# Altium PCB Driver Morpheu v4.0.PcbDoc
Units mm, origin at the board's own origin, x right, y up, seen from the top; angles counter-clockwise.
Board outline 51.05 x 56.52 mm, 2 copper layers (Top Layer, Bottom Layer); 74 components, 41 nets, 232 pads, 39 vias.
Unrouted connection lines stored in the file: 14.
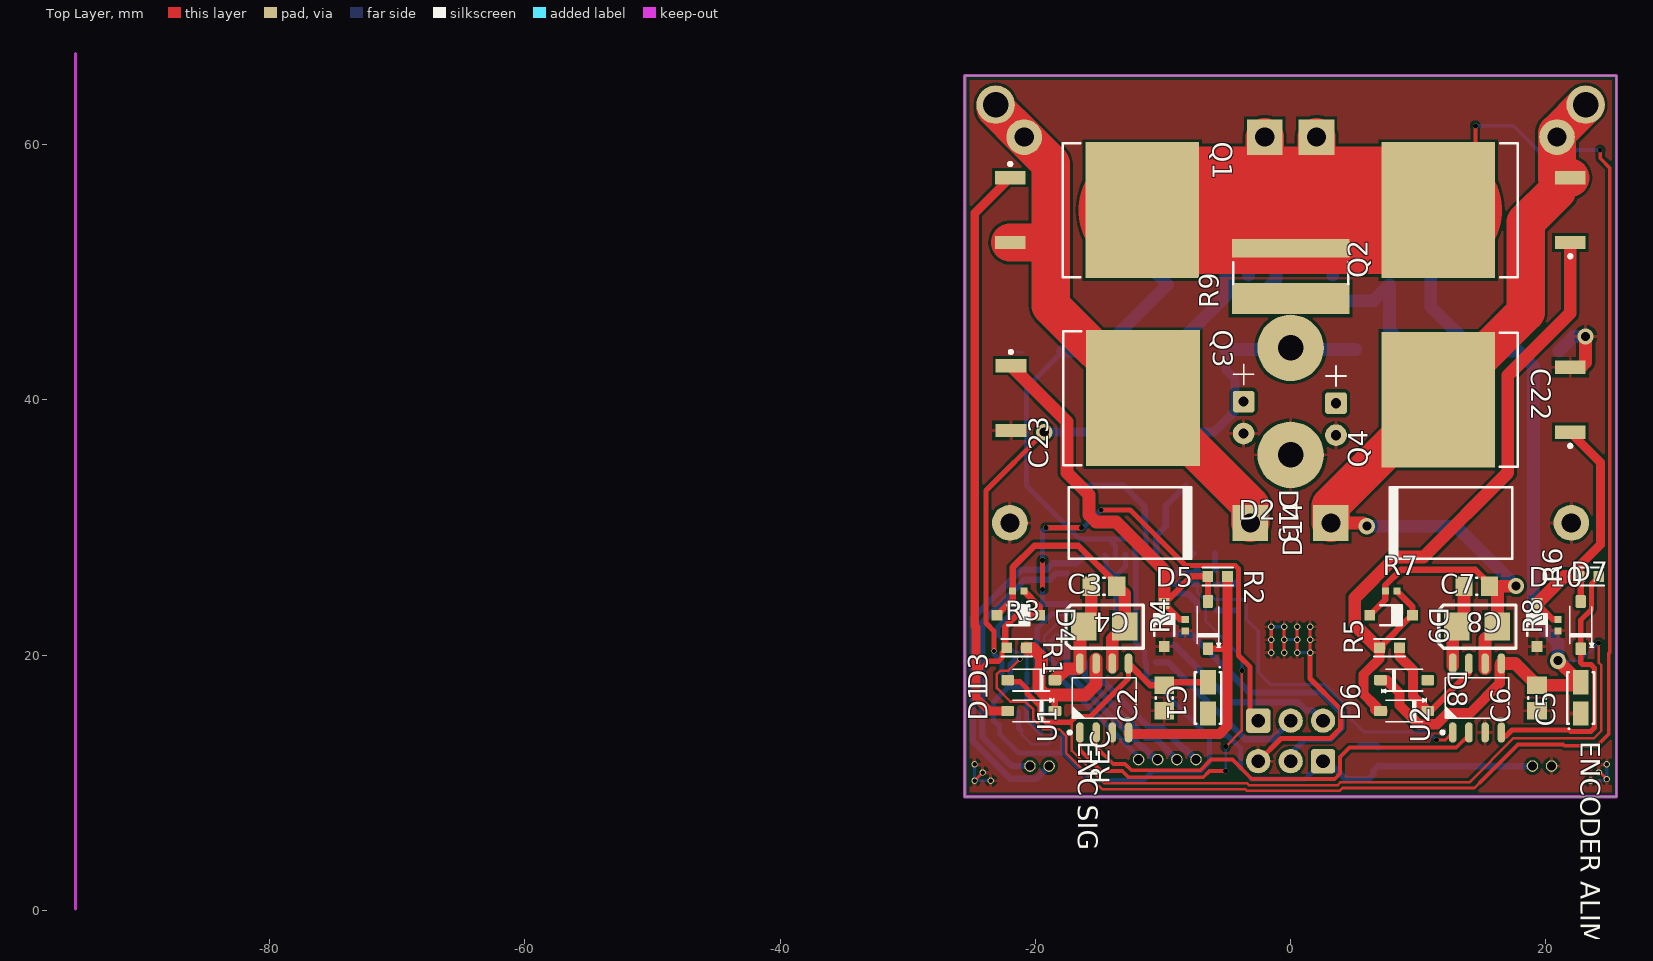
[diagram p0: Top Layer view]
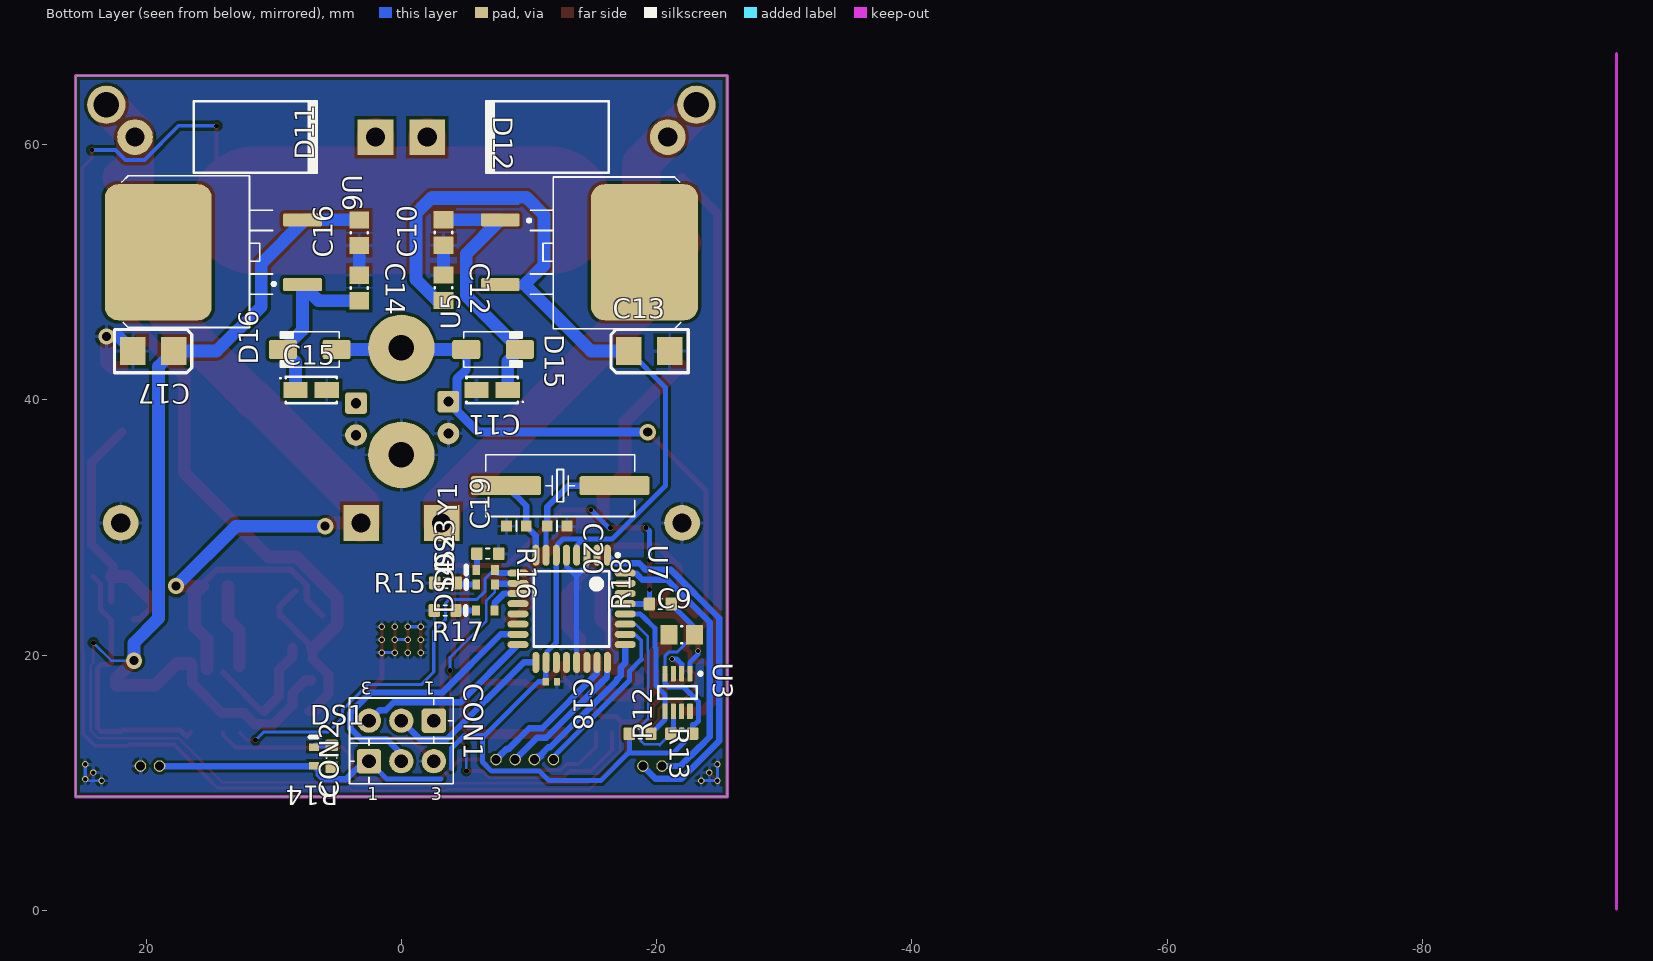
[diagram p1: Bottom Layer view, seen from below]
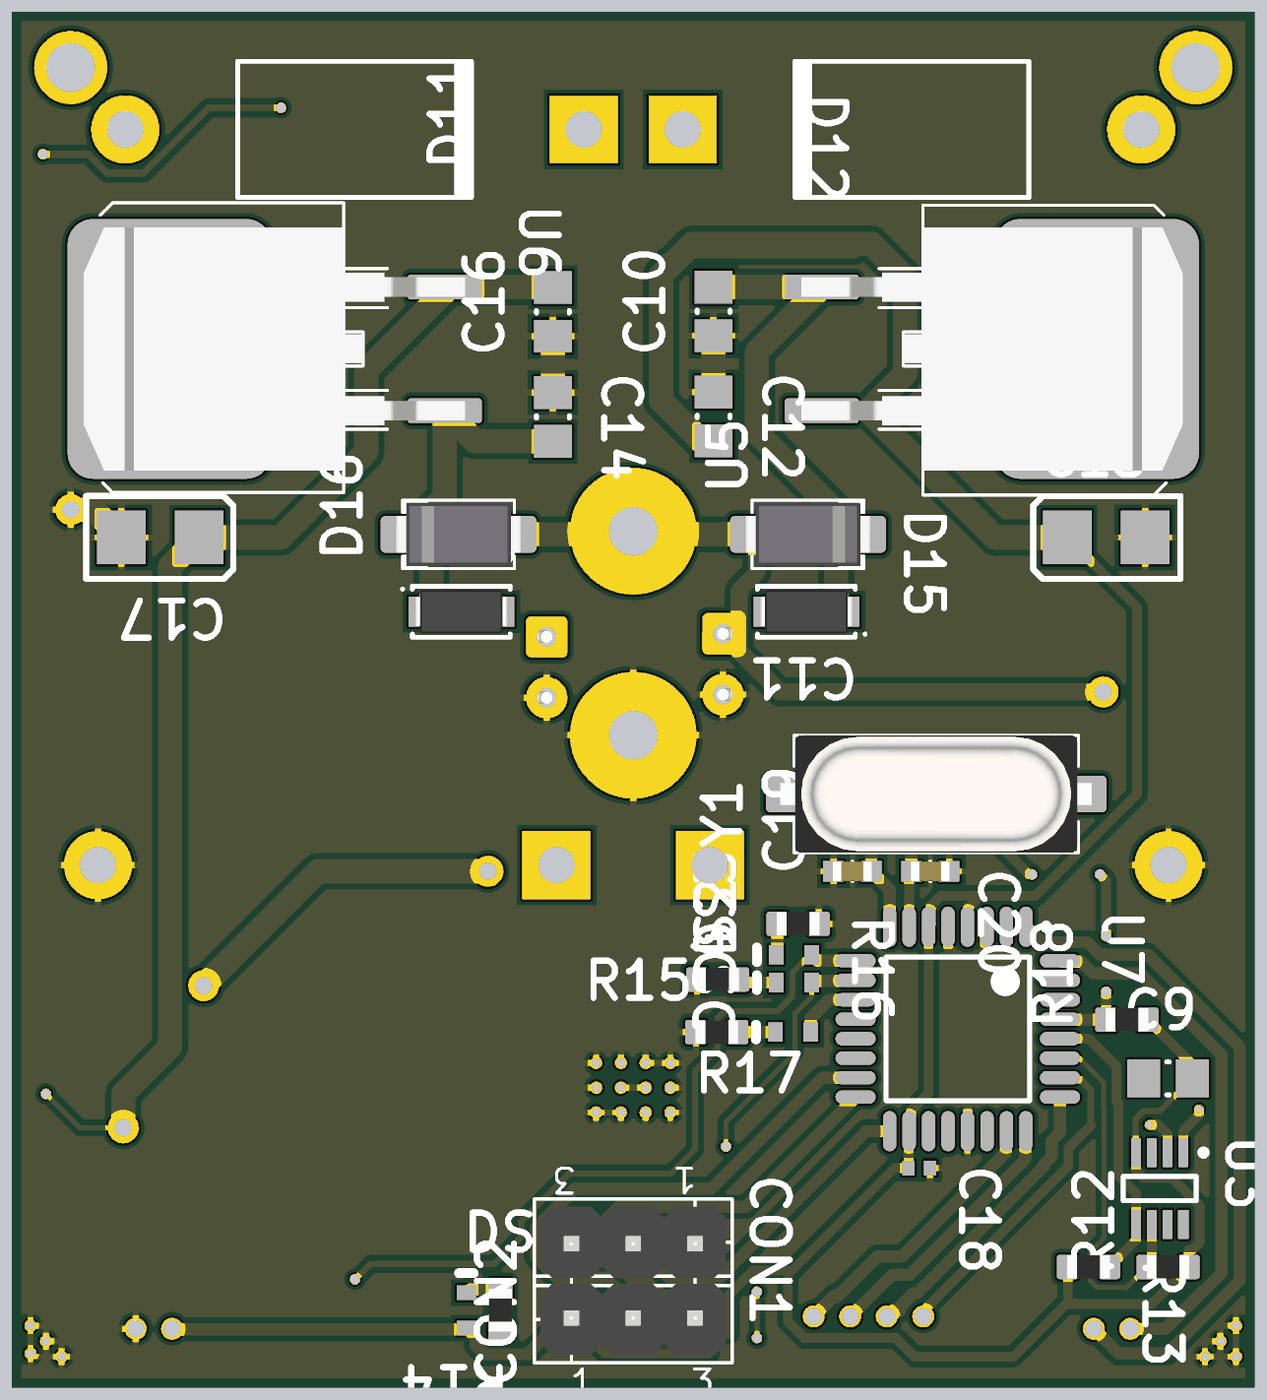
[diagram p2: 3D render of the assembled board from below, using the file's embedded part models]

## Layer stack, top to bottom
Top Solder: solder mask 0.0102, Solder Resist, Dk 3.5
Top Layer: signal copper 0.0356
Dielectric 1: dielectric 0.32, FR-4, Dk 4.8
Bottom Layer: signal copper 0.0356
Bottom Solder: solder mask 0.0102, Solder Resist, Dk 3.5

## Board outline
-25.527,8.89 -25.527,65.405 25.527,65.405 25.527,8.89

## Design rules (kind name [scope] priority, off if disabled: settings)
Clearance [All] p1: gap=0.24 ignorepadtopadclearanceinfootprint=FALSE except(0: Arc-Hole Track-Hole SMDPad-Hole THPad-Hole Via-Hole Fill-Hole Poly-Hole Region-Hole Text-Hole)
PolygonConnect [All] p1: connectstyle=Relief reliefconductorwidth=0.254 reliefentries=4 polygonreliefangle="90 Angle" airgapwidth=0.254
RoutingVias [All] p1: holewidth=0.3 width=0.4 viastyle="Through Hole" minholewidth=0.3 minwidth=0.4 maxholewidth=0.4 maxwidth=0.5
SMDNeckDown [InNet('No Net')] p1: percent=70.000
SolderMaskExpansion [All] p1: expansion=0.102
Width [All] p1: maxlimit=15 minlimit=0.01 preferedwidth=0.2
30 further rules are at their usual default settings.

## Classes and differential pairs
component class "Driver Morpheu v4.0 CENTRAL": C10 C11 C12 C13 C18 C19 C20 CON1 D15 DS1 DS2 DS3 DS4 "ENC SIG" "ENCODER ALIM" R14 R15 R16 R17 R18 U5 Y1
component class "Driver Morpheu v4.0 PONTE H": C1 C2 C3 C4 C5 C6 C7 C8 C14 C16 C17 C22 C23 D2 D3 D5 D6 D7 D8 D9 D10 D11 D12 D13 D14 D16 Q1 Q2 Q3 Q4 R1 R2 R3 R4 R5 R7 R8 R9 U1 U2 U6
component class "Driver Morpheu v4.0 SENSOR CORRENTE": C9 R12 R13

## Components (designator, comment, footprint, x,y, rotation, side; value= is the part's Value field where it differs from the comment)
C1 "100uF 25v" CAP_100u_25v_Tantalum -6.477,16.637 r270 top
C2 "CAP 100nF 25V 0805(2012)" CAPC0805(2012)145_M#1 -9.906,16.637 r90 top
C3 "TAJB106K020R" AVX-CAPC3528_V -14.605,22.225 r0 top
C4 "CAP 100nF 25V 0805(2012)" CAPC0805(2012)145_M#2 161.02,-48.641 r180 top
C5 "100uF 25v" CAP_100u_25v_Tantalum 22.733,16.637 r90 top
C6 "CAP 100nF 25V 0805(2012)" CAPC0805(2012)145_M#1 19.304,16.637 r90 top
C7 "TAJB106K020R" AVX-CAPC3528_V 14.605,22.225 r0 top
C8 "CAP 100nF 25V 0805(2012)" CAPC0805(2012)145_M#2 190.23,-48.641 r180 top
C9 "CAP 100nF 25V 0805(2012)" CAPC0805(2012)145_M#1 -21.971,21.59 r180 bottom
C10 "CAP 100nF 25V 0805(2012)" CAPC0805(2012)145_M#1 -3.302,53.102 r90 bottom
C11 "Cap_10u_35v" CAP_100u_25v_Tantalum -7.112,40.767 r0 bottom
C12 "CAP 100nF 25V 0805(2012)" CAPC0805(2012)145_M#1 -3.302,48.784 r270 bottom
C13 "TAJB106K020R" AVX-CAPC3528_V -19.431,43.815 r180 bottom
C14 "CAP 100nF 25V 0805(2012)" CAPC0805(2012)145_M#1 3.302,48.768 r270 bottom
C15 "Cap_10u_35v" CAP_100u_25v_Tantalum 7.067,40.767 r180 bottom
C16 "CAP 100nF 25V 0805(2012)" CAPC0805(2012)145_M#1 3.302,53.086 r90 bottom
C17 "TAJB106K020R" AVX-CAPC3528_V 19.431,43.815 r0 bottom
C18 "GRM155R71C104KA88D" CAP-0402 -11.752,17.907 r180 bottom
C19 "22pF" SMD-0603C -9.004,30.099 r90 bottom
C20 "22pF" SMD-0603C -12.205,30.099 r270 bottom
C22 "1000u" CAPAE250P680X1220_FLAT1 3.556,38.481 r270 top
C23 "1000u" CAPAE250P680X1220_FLAT2 -3.683,38.608 r90 top
CON1 "BARRAM. PIN" 1x3POS_HEADER 0,14.859 r270 bottom
CON2 "" 1x3POS_HEADER 0,11.684 r90 bottom
D1 "Diode 1N4148" SOD123 -20.32,15.621 r180 top
D2 "Diode 1N4148" SOD123 -6.477,22.352 r90 top
D3 "Diode 1N4148" SOD123 -20.32,18.034 r180 top
D4 "MMSZ5246B-E3-08" VISH-SOD-123-2_V -21.336,23.114 r0 top
D5 "MMSZ5246B-E3-08" VISH-SOD-123-2_V -9.906,22.352 r90 top
D6 "Diode 1N4148" SOD123 8.89,15.621 r180 top
D7 "Diode 1N4148" SOD123 22.733,22.352 r90 top
D8 "Diode 1N4148" SOD123 8.89,18.034 r0 top
D9 "MMSZ5246B-E3-08" VISH-SOD-123-2_V 7.874,23.114 r0 top
D10 "MMSZ5246B-E3-08" VISH-SOD-123-2_V 19.304,22.352 r90 top
D11 "Diode 1N5408" DO-201AD -11.452,60.579 r0 bottom
D12 "Diode 1N5408" DO-201AD 11.452,60.579 r180 bottom
D13 "Diode 1N5408" DO-201AD -12.573,30.353 r0 top
D14 "Diode 1N5408" DO-201AD 12.573,30.353 r180 top
D15 "100V; 1.5A" DO-214AC -7.18,43.942 r180 bottom
D16 "100V; 1.5A" DO-214AC 7.18,43.942 r0 bottom
DS1 "TLMB1100-GS08" VISH-TLMX1100-2_V 6.858,12.065 r90 bottom
DS2 "TLMB1100-GS08" VISH-TLMX1100-2_V -6.604,25.527 r0 bottom
DS3 "TLMB1100-GS08" VISH-TLMX1100-2_V -6.604,26.67 r0 bottom
DS4 "TLMB1100-GS08" VISH-TLMX1100-2_V -6.567,23.495 r0 bottom
"ENC SIG" "B2B-ZR" B2B-ZR -20.423,11.303 r0 top
"ENCODER ALIM" "B2B-ZR" B2B-ZR 18.947,11.303 r0 top
Q1 "IRF3205S" D2PAK_N -15.171,54.864 r0 top
Q2 "IRF3205S" D2PAK_N 15.113,54.864 r180 top
Q3 "IRF3205S" D2PAK_N -15.113,40.132 r0 top
Q4 "IRF3205S" D2PAK_N 15.107,40.005 r180 top
R1 "22" SMD-0603-RES -21.463,20.574 r270 top
R2 "22" SMD-0603-RES -5.715,26.162 r270 top
R3 "RC0402JR-071KL" RES-0402 -21.336,25.019 r0 top
R4 "RC0402JR-071KL" RES-0402 -8.255,22.352 r90 top
R5 "22" SMD-0603-RES 7.747,20.574 r90 top
R6 "22" SMD-0603-RES 23.368,26.162 r90 top
R7 "RC0402JR-071KL" RES-0402 7.874,25.019 r0 top
R8 "RC0402JR-071KL" RES-0402 20.955,22.352 r90 top
R9 "KRL9045-C-R008-F-T1" "8m OHM 4W" 0,49.911 r90 top
R12 "Thick Film" RESC1608X55N -21.971,13.843 r0 bottom
R13 "Thick Film" RESC1608X55N -18.708,13.843 r180 bottom
R14 "Thick Film" RESC1608X55N 5.461,12.065 r270 bottom
R15 "Thick Film" RESC1608X55N -3.468,25.654 r0 bottom
R16 "Thick Film" RESC1608X55N -6.77,27.94 r180 bottom
R17 "Thick Film" RESC1608X55N -3.429,23.495 r0 bottom
R18 "Thick Film" RESC1608X55N -20.281,24.003 r0 bottom
REC "B4B-ZR" B4B-ZR -7.414,11.811 r180 top
U1 "IR2184" SOIC127P600X175-8AN -14.605,16.637 r90 top
U2 "IR2184" SOIC127P600X175-8AN 14.605,16.637 r90 top
U3 "INA219AIDCNR" DCN0008A_M -21.631,17.067 r270 bottom
U5 "L7805" D2PAK-3 -13.399,51.562 r0 bottom
U6 "L7812" D2PAK-3 13.399,51.562 r180 bottom
U7 "ATmega328P-AU" 32A_N -13.335,23.622 r270 bottom
Y1 "16MHz" CRYSTAL_HC49-US-SM -12.446,33.274 r0 bottom

## Footprints (in the part's own frame and the unit in brackets; to place one, negate y for a bottom-side part, rotate by r counter-clockwise, add the part's x,y. Pads: shape width x height; smd on the part's side, far side on the other; paste and mask are expansions set on the pad)
1x3POS_HEADER [mil] "Connector Header, Single-row 3-position, 0.100\" pitch"
  rrect25% 75x75 hole 42: 1(0,100)
  round 75 hole 42: 2(0,0) 3(0,-100)
  silkscreen extent -70,-160 70,160, body extent -57,-150 57,150, height 335
"8m OHM 4W" [mm] "Chip Resistor, 2-Leads, Body 4,50x8,95mm, IPC Medium Density"
  rect 2.45x9.2 smd: 1(-1.975,0)
  rect 1.45x9.2 smd: 2(1.975,0)
  silkscreen extent -0.85,-4.5 0.85,4.5, body extent -2.35,-4.6 2.35,4.6, height 0.7
32A_N [mm] "Thin QFP, 32-Leads, Body 7x7mm, Pitch 0.8mm, IPC Medium Density"
  oval 1.65x0.55 smd: 1(-4.2,2.8) 2(-4.2,2) 3(-4.2,1.2) 4(-4.2,0.4) 5(-4.2,-0.4) 6(-4.2,-1.2) 7(-4.2,-2) 8(-4.2,-2.8) 17(4.2,-2.8) 18(4.2,-2) 19(4.2,-1.2) 20(4.2,-0.4) 21(4.2,0.4) 22(4.2,1.2) 23(4.2,2) 24(4.2,2.8)
  oval 0.55x1.65 smd: 9(-2.8,-4.2) 10(-2,-4.2) 11(-1.2,-4.2) 12(-0.4,-4.2) 13(0.4,-4.2) 14(1.2,-4.2) 15(2,-4.2) 16(2.8,-4.2) 25(2.8,4.2) 26(2,4.2) 27(1.2,4.2) 28(0.4,4.2) 29(-0.4,4.2) 30(-1.2,4.2) 31(-2,4.2) 32(-2.8,4.2)
  silkscreen extent -4.32,-2.95 2.95,3.75, body extent -3.5,-3.5 3.5,3.5, height 1.2
AVX-CAPC3528_V [mm] "SMT Capacitor, 2 Leads, Body 3.5x2.8mm"
  rect 2x2.2 smd: 1(-1.6,0) 2(1.6,0)
  silkscreen extent -3,-1.7 3.05,1.7, body extent -1.79,-1.54 1.8,1.54, height 1.9
B2B-ZR [mm]
  round 0.9 hole 0.7: 1(0,0) 2(1.5,0)
  body extent -1.5,-1.3 3,2.2, height 4.5
B4B-ZR [mm]
  round 0.9 hole 0.7: 1(0,0) 2(1.5,0) 3(3,0) 4(4.5,0)
  body extent -1.5,-1.3 6,2.2, height 4.5
CAP-0402 [mm]
  rect 0.5x0.62 smd: 1(-0.44,0) 2(0.44,0)
  body extent -0.53,-0.28 0.53,0.27, height 0.55
CAP_100u_25v_Tantalum [mm] "Molded Capacitor, 2-Leads, Body 3,20x1,60mm, IPC Medium Density"
  rect 1.9x1.25 smd: 1(-1.225,0) 2(1.225,0)
  silkscreen extent -2.46,-1.05 2.01,1.05, body extent -1.92,-0.9 1.92,0.9, height 1.8
CAPAE250P680X1220_FLAT1 [mm]
  round 0.508 on Mech14: 0(0,0)
  rrect25% 1.7x1.7 hole 0.8: 1(-1.25,0)
  round 1.7 hole 0.8: 2(1.25,0)
  silkscreen extent -4.18,-0.8 -2.58,0.8, body extent -3.4,-0.25 3.4,12.95, height 12.4
CAPAE250P680X1220_FLAT2 [mm]
  round 0.508 on Mech14: 0(0,0)
  rrect25% 1.7x1.7 hole 0.8: 1(1.25,0)
  round 1.7 hole 0.8: 2(-1.25,0)
  silkscreen extent 2.58,-0.8 4.18,0.8, body extent -3.4,-0.25 3.4,12.95, height 12.4
CAPC0805(2012)145_M#1 [mm] "Chip Capacitor, Body 2.0x1.2mm, Height 1.45mm, IPC Low Density"
  rect 1.35x1.55 smd: 1(-1,0) 2(1,0)
  silkscreen extent -0.05,-0.67 0.05,0.67, body extent -1.1,-0.72 1.1,0.72, height 1.45
CAPC0805(2012)145_M#2 [mm] "Chip Capacitor, Body 2.0x1.2mm, Height 1.45mm, IPC Low Density"
  rect 1.35x1.55 smd: 1(174.641,-74.041) 2(176.641,-74.041)
  silkscreen extent 175.59,-74.72 175.69,-73.37, body extent 174.54,-74.77 176.74,-73.32, height 1.45
CRYSTAL_HC49-US-SM [mm] "SMD Crystal HC49/US-SM package"
  round 0.508 on Mech15: 0(0,0)
  rrect25% 5.5x1.5 smd: 1(-4.25,0) 2(4.25,0)
  silkscreen extent -5.84,-2.41 5.84,2.41, body extent -6.4,-2.41 6.4,2.42, height 4.29
D2PAK-3 [mil] "D-PAK/TO-263-3; 3 Leads (1 Cropped); Body 14.7 (inc. leads) x 10.2 mm (LxW max)"
  round 20 on Mech15: 0(0,0)
  rrect25% 120x40 smd: 1(222.5,-100) 3(222.5,100)
  rrect25% 330x420 smd: 4(-222.5,0)
  silkscreen extent -335,-232 139,236, body extent -361,-197 256,197, height 189
D2PAK_N [mm] "D2-PAK, 4-Leads, Body 8.8x10.4mm, Pitch 2.54mm, Lead Span 15.1mm, IPC Medium Density"
  rect 2.4x1.05 smd: 1(-6.8,2.54) 3(-6.8,-2.54)
  rect 8.9x10.65 smd: 2(3.55,0)
  silkscreen extent -6.92,-5.25 -1.3,5.25, body extent -2.7,-5.28 6.3,5.28, height 4.69
DCN0008A_M [mm] "SOT23, 8-Leads, Body 3x1.75mm, Pitch 0.65mm, IPC Low Density"
  rrect22% 1.2x0.4 smd: 1(-1.475,0.975) 2(-1.475,0.325) 3(-1.475,-0.325) 4(-1.475,-0.975) 5(1.475,-0.975) 6(1.475,-0.325) 7(1.475,0.325)
  rrect22% 1.2x0.45 smd: 8(1.475,0.975)
  silkscreen extent -1.6,-1.5 0.5,1.92, body extent -0.88,-1.5 0.87,1.5, height 1.45
DO-201AD [mm] "Diode, Axial; Body 9.5 x 5.6 mm (LxDia. max), Lead Dia. 1.32 mm (max)"
  round 2.8 hole 1.5: 1(-9.42,0)
  rect 2.8x2.8 hole 1.5: 2(9.42,0)
  silkscreen extent -4.8,-2.8 4.9,2.8
DO-214AC [mm] "JEDEC DO214 variation AC. SMA"
  round 0.508 on Mech15: 0(0,0)
  rrect25% 2.2x1.5 smd: A(-2.1,0) K(2.1,0)
  silkscreen extent -2.3,-1.4 2.3,1.4, body extent -2.6,-1.3 2.6,1.3, height 2.42
RES-0402 [mm]
  rect 0.55x0.55 smd: 1(-0.45,0) 2(0.45,0)
  body extent -0.53,-0.27 0.53,0.28, height 0.4
RESC1608X55N [mm] "Chip Resistor, Body 1.6x0.8mm, EIA 0603, IPC Medium Density"
  round 0.254 on Mech15: 0(0,0)
  rrect25% 0.9x1 smd: 1(-0.85,0) 2(0.85,0)
  Top Layer pour cut-out: -0.6,0.5 -0.4,0.7 0.4,0.7 0.6,0.5 0.6,-0.5 0.4,-0.7 -0.4,-0.7 -0.6,-0.5
  silkscreen extent -0.15,-0.41 0.15,0.41, body extent -0.87,-0.47 0.88,0.48, height 0.54
SMD-0603-RES [mm]
  rect 0.85x0.85 smd: 1(0,0.775) 2(0,-0.775)
  silkscreen extent -0.7,-1.2 0.7,1.2, body extent -0.4,-0.85 0.4,0.85, height 0.56
SMD-0603C [mm]
  rect 0.85x0.85 smd: 1(0,0.775) 2(0,-0.775)
  silkscreen extent -0.4,0 0.4,0, body extent -0.4,-0.8 0.4,0.8, height 0.9
SOD123 [mm] "SOD-123; 2 Leads; Body 2.7 x 1.6 mm, (LxW)"
  round 0.508 on Mech15: 0(0,0)
  rrect25% 1x0.8 smd: A(1.85,0) K(-1.85,0)
  silkscreen extent -1.75,-1 1.45,0.85, body extent -1.95,-0.9 1.95,0.9, height 1.18
SOIC127P600X175-8AN [mm] "SOIC, 8-Leads, Body 4.9x3.9mm, Pitch 1.27mm, IPC Medium Density"
  round 1 on Mech15: 0(0,0)
  oval 1.6x0.6 smd: 1(-2.7,1.905) 2(-2.7,0.635) 3(-2.7,-0.635) 4(-2.7,-1.905) 5(2.7,-1.905) 6(2.7,-0.635) 7(2.7,0.635) 8(2.7,1.905)
  silkscreen extent -2.82,-2.5 1.6,2.82, body extent -3,-2.45 3,2.45, height 1.75
VISH-SOD-123-2_V [mm] "SMD, 2-Leads, Body 2.7x1.55mm, Height 1.35mm"
  rect 0.85x0.85 smd: 1(-1.675,0) 2(1.675,0)
  silkscreen extent -0.85,-0.78 0.85,0.78, body extent -1.35,-0.77 1.35,0.77, height 1.35
VISH-TLMX1100-2_V [mm] "SMD, 2-Leads, Body 1.6x0.8mm"
  rect 0.6x0.8 smd: 1(-0.725,0) 2(0.725,0)
  silkscreen extent 1.53,-0.3 1.53,0.3, body extent -0.8,-0.4 0.8,0.4, height 0.65

## Part data
C1 C5: library part Cap_100u_25v, "Cap Tântalo"
C2 C4 C6 C8 C9 C10 C12 C14 C16: library part CMP-1036-04408-1, "CAP 100nF 25V ±5% 0805 (2012 Metric) Thickness 1.45mm SMD"
C3 C7 C13 C17: library part CMP-0279-00001-1, "Capacitor, Tantalum, 10uF 10% 20V MCCT-B (3528)"
C18: library part "Cap 100nF 0402", "0.10µF 16V Ceramic Capacitor X7R 0402 (1005 Metric) 0.039\" L x 0.020\" W (1.00mm x 0.50mm)"
C19 C20: library part GQM1885C1H220GB01D, "CAP CER 22PF 50V NP0 0603"
C22 C23: library part CAPACITOR, "CAP MLCC SMT"
CON1 CON2: library part 03x01_Conector_Male_Shroudred, "CONN HEADER XH TOP 3POS 2.5MM"
D1 D2 D3 D6 D7 D8: "High Conductance Fast Diode"
D4 D5 D9 D10: library part CMP-0931-00032-1, "Small Signal Zener Diode, 16 V +/- 5%, -55 to 155 degC, 2-Pin SOD-123, RoHS, Tape and Reel"
D11 D12 D13 D14: "3 Amp Medium Power Silicon Rectifier Diode"
D15 D16: library part DIODE_100V_1.5A_SMA, "Diode SMD 100V 1.5A SMA"
DS1: library part CMP-1666-00028-1, "Red LED, 10 mA, 3.9 V, -40 to 100 degC, 2-Pin SMD (0603), RoHS, Tape and Reel"
DS2 DS3: library part CMP-1666-00028-1, "Blue LED, 10 mA, 3.9 V, -40 to 100 degC, 2-Pin SMD (0603), RoHS, Tape and Reel"
DS4: library part CMP-1666-00028-1, "Green LED, 10 mA, 3.9 V, -40 to 100 degC, 2-Pin SMD (0603), RoHS, Tape and Reel"
Q1 Q2 Q3 Q4: "HEXFET Power MOSFET"
R1 R2 R5 R6: library part ERJ-3EKF22R0V, "RES SMD 22 OHM 1% 1/10W 0603"
R3 R4 R7 R8: library part "RES 1K 0402", "RES SMD 1K OHM 5% 1/16W 0402"
R9: library part CMP-1666-00018-2, "Chip Resistor, 0.008 Ohm, +/- 1%, 4 W"
R12 R13 R18: library part RES_10K_0603_1%, "Resistor SMD chip 10k Ohm 0.1W 1% 0603"
R14 R15 R16 R17: library part RES_220R_0603_5%, "Resistor SMD chip 220 Ohm 0.1W 5% 0603"
U3: library part CMP-0704-00041-2, "Zero-Drift, Bi-directional Current / Power Monitor, 3 to 5.5 V, -40 to 125 degC, 8-pin SOP (DCN8), Green (RoHS & no Sb/Br)"
U5: library part LM7805
U6: library part LM7812
U7: "8-bit AVR Microcontroller, 32KB Flash, 1KB EEPROM, 2KB SRAM, 32-pin TQFP, Industrial Grade (-40°C to 85°C)"
Y1: library part XTAL, "Crystal Oscillator"

## Free pads (board coordinates)
  round 5.2 hole 2: 2(0,44.069) 5(0,35.687)
  round 3 hole 2: 3(-23.114,63.119) 4(23.114,63.119)

## Via types
v1: diameter 0.5, hole 0.35, Top Layer to Bottom Layer, 20 vias
v2: diameter 0.4, hole 0.4, Top Layer to Bottom Layer, 12 vias
v3: diameter 1.27, hole 0.711, Top Layer to Bottom Layer, 5 vias
v4: diameter 0.4, hole 0.3, Top Layer to Bottom Layer, 2 vias

## Nets (pads, with @x,y where several pads share a name; then routed paths per layer and width w, separated by ;. In a path a pad name is that pad's centre, name@x,y a point inside that pad or via, vN(x,y) a via of type N, cw(c..) or ccw(c..) an arc to the next point about the centre after c; other vN are vias at no path point)
+5V: "ENCODER ALIM.1" C9.2 C12.2 C13.1 C18.1 CON2.1 DS1.1 R12.1 R13.1 R18.1 U3.4 U5.3 U7.4 U7.6 U7.18 | length 149.8
  Bottom Layer w0.2: -9.144,55.372 -1.905,55.372 -1.27,55.372
  Bottom Layer w0.25: C9.2 -21.631,20.25 -20.975,20.25 -20.644,19.919 -20.644,18.554 U3.4
  Bottom Layer w0.4: C9.2 -22.971,22.163 R18.1 ; U3.4 -20.666,18.532 -20.666,17.786 -20.95,17.502 -22.114,17.502 -23.271,16.345 -23.271,14.839 -22.984,14.552 -22.821,14.552 R12.1 -21.297,12.319 -17.936,12.319 -17.858,12.397 ; R13.1 -17.858,12.397 ; C13.1 -20.701,40.945 -20.701,33.267 -16.521,29.087 -14.239,29.087 ; U7.4 -13.735,28.583 -14.239,29.087 ; -3.932,11.107 -3.932,12.695 -4.936,13.699 -6.524,13.699 ; -3.117,10.292 1.148,10.292 CON2.1 ; -17.858,12.397 -15.621,10.16 -11.557,10.16 -10.796,10.921 -7.045,10.921 -6.35,11.616 -6.35,13.525 -6.524,13.699 ; -14.239,29.087 -12.639,29.087 -12.22,28.668 -12.22,27.907 U7.6 -12.135,20.983 -11.42,20.268 -11.42,19.507 U7.18 -11.312,19.399 C18.1 -10.732,17.907 -6.524,13.699
  Bottom Layer w0.5: CON2.1 2.921,11.684 4.344,10.261 6.104,10.261 6.465,10.622 6.465,10.947 DS1.1 6.921,11.277 18.947,11.277 18.947,11.303
  Bottom Layer w1: C13.1 -14.859,43.815 -9.652,49.022 -11.176,50.546 -11.176,54.483 -9.779,55.88 -2.413,55.88 -1.905,55.372 -1.143,54.61 -1.143,49.427 -2.786,47.784 C12.2
+12V: C1.1 C2.2 C5.2 C6.2 C16.2 C17.1 D3.A D8.K U1.5 U2.5 U6.3 | length 148.9
  Top Layer w0.2: -16.817,15.177 -16.817,15.036 -17.15,14.702 -17.15,12.511 -14.58,9.941 -3.389,9.941 -3.245,9.797 3.663,9.797 3.89,10.024 14.007,10.024 17.475,13.492 21.692,13.492 21.702,13.482 23.764,13.482 24.338,14.056 24.338,19.218 24.13,19.426 v2(24.13,20.955)
  Top Layer w0.4: D3.A -22.043,17.907 -21.209,17.907 -20.664,17.362 -20.664,16.991 -19.619,15.946 -19.619,15.174 -19.177,14.732 -17.261,14.732 -16.817,15.177 -15.684,15.177 -12.7,18.161 U1.5
  Top Layer w0.5: U1.5 -11,17.637 C2.2 -9.681,17.862 C1.1
  Top Layer w0.8: D8.K 7.525,18.034 8.532,17.027 8.532,16.063 10.028,14.567 11.049,14.567 11.063,14.581 11.447,14.581 12.319,15.453 14.058,15.453 16.385,17.78 16.385,19.212 U2.5
  Top Layer w1: U2.5 17.604,19.337 C6.2 22.318,17.637 22.318,18.195 v3(20.955,19.558)
  Bottom Layer w0.2: v3(20.955,19.558) 22.733,19.558 v2(24.13,20.955)
  Bottom Layer w1: C16.2 3.318,54.102 7.544,54.102 10.973,50.673 10.973,47.32 14.478,43.815 C17.1 19.028,42.618 19.028,22.882 19.05,22.86 ; 19.05,23.114 19.05,22.86 ; v3(20.955,19.558) 20.955,20.955 19.05,22.86
"BAT 5S": D15.A D16.A pad.2 R9.1 U3.1 | length 54.4
  Top Layer w0.2: pad.2@-1,44.069 -1,44.127 pad.2@1,44.127
  Top Layer w0.4: v4(-23.241,20.32) -23.241,21.872 -23.876,22.507 -23.876,32.893 v3(-19.304,37.465)
  Bottom Layer w0.4: v4(-23.241,20.32) -23.241,20.066 -22.606,19.431 U3.1
  Bottom Layer w0.7: v3(-19.304,37.465) -6.027,37.465 -4.347,39.145 -4.347,41.636 -5.08,42.369 D15.A
  Bottom Layer w1: D15.A -0.127,43.942 pad.2 0.127,43.942 D16.A
ENC_1: "ENC SIG.1" U7.32 | length 21.9
  Bottom Layer w0.5: -20.423,11.303 -21.856,11.303 -23.392,12.839 -23.414,12.839 -24.17,13.595 -24.17,22.561 -21.724,25.007 -20.823,25.908 -18.881,25.908 -18.402,26.387 -17.57,26.387 U7.32
ENC_2: "ENC SIG.2" U7.1 | length 28.1
  Bottom Layer w0.5: -18.923,11.303 -19.931,10.295 -21.936,10.295 -24.91,13.269 -24.91,22.887 -21.127,26.67 -19.165,26.67 -18.648,27.187 -16.77,27.187 U7.1
GND: "ENCODER ALIM.2" C2.1 C5.1 C6.1 C9.1 C10.1 C11.2 C12.1 C13.2 C14.1 C15.2 C16.1 C17.2 C18.2 C19.1 C20.1 C22.2 C23.2 CON2.3 D5.1 D10.1 D13.1 D14.1 pad.5 Q3.3 Q4.3 R4.1 R8.1 R14.2 R15.2 R16.2 R17.2 U1.3 U2.3 U3.3 U3.7 U3.8 U7.3 U7.5 U7.21 | length 54.1
  Top Layer w0.25: v1(-24.765,10.16) v1(-24.13,10.795) ; v1(-1.524,20.193) v1(-1.524,21.209) v1(-1.524,22.225) ; v1(-0.508,20.193) v1(-0.508,21.209) v1(-0.508,22.225) ; v1(0.508,20.193) v1(0.508,21.209) v1(0.508,22.225) ; v1(1.524,20.193) v1(1.524,21.209) v1(1.524,22.225) ; v1(24.13,10.795) 24.257,10.795 v1(24.765,10.287)
  Top Layer w0.4: CON2.3 -0.757,13.467 3.117,13.467 3.932,14.282 3.932,15.748 1.524,18.156 v1(1.524,20.193)
  Top Layer w1: Q4.3 22.733,42.545 23.114,42.926 v3(23.114,44.958)
  Bottom Layer w0.2: C13.2@-21.412,43.815 -21.412,43.713 C13.2@-21.031,43.713 ; v1(23.495,10.16) v1@24.638,10.16
  Bottom Layer w0.25: v1(-24.765,11.43) v1(-24.765,10.16) v1(-23.495,10.16) ; v1(-1.524,22.225) v1(-0.508,22.225) ; v1(-0.508,21.209) v1(0.508,21.209) ; v1(0.508,20.193) v1(1.524,20.193) ; v1(24.765,10.287) v1(24.765,11.43)
  Bottom Layer w0.4: U7.3 -14.45,27.737 -14.45,26.871 -13.735,26.156 ; U7.21 -13.735,26.156 ; U7.5 -12.935,26.956 -13.735,26.156
  Bottom Layer w0.5: C20.1 C20.1@-12.956,30.075 ; U7.5@-12.956,27.843 U7.5 ; R16.2@-7.633,27.94 R16.2
  Bottom Layer w1: C12.1 C10.1 ; C14.1 C16.1 ; C17.2 22.174,44.958 v3(23.114,44.958)
NetC3_1: C3.1 C4.2 D3.K U1.8 | length 19.9
  Top Layer w1: C3.1 -15.621,22.809 C4.2 ; D3.K@-18.47,18.134 D3.K@-18.37,18.134 ; D3.K@-18.47,18.134 D3.K@-18.37,18.134 ; D3.K@-18.47,18.134 D3.K@-18.37,18.134 ; D3.K@-18.37,18.134 -17.581,18.923 -16.637,18.923 -16.51,19.05 U1.8 ; U1.8 C3.1@-16.51,22.428 ; U1.8 C3.1@-16.51,22.428 ; U1.8 C3.1@-16.51,22.428 ; U1.8 C3.1@-16.51,22.428 ; C3.1@-16.51,22.428 C3.1@-16.205,22.733 ; C3.1@-16.51,22.428 C3.1@-16.205,22.733 ; C3.1@-16.51,22.428 C3.1@-16.205,22.733
NetC3_2: C3.2 C4.1 D4.1 D11.1 D13.2 pad.3 Q1.3 Q3.2 R3.1 U1.6 | length 65.8
  Top Layer w0.5: D4.1 -21.786,24.339 R3.1 -21.786,26.855 -20.066,28.575 -16.633,28.575 -13.621,25.563 C4.1
  Top Layer w1: U1.6@-13.97,19.05 U1.6 -13.97,21.26 C3.2 -13.005,24.784 C4.1
  Top Layer w3: pad.3 -23.114,62.821 D11.1 -18.796,58.503 -18.796,52.197 ; Q1.3 -18.923,52.324 -18.796,52.197 ; D13.2 -3.153,31.722 Q3.2 -18.796,47.365 -18.796,52.197
NetC7_1: C7.1 C8.2 U2.8 | length 6.6
  Top Layer w1: U2.8@12.7,19.177 U2.8 12.7,21.92 C7.1 13.589,22.809 C8.2
NetC7_2: C7.2 C8.1 D9.1 D12.1 D14.2 pad.4 Q2.3 Q4.2 R7.1 U2.6 | length 81
  Top Layer w0.2: Q4.2 11.557,40.126 11.557,40.132 11.563,40.132 11.684,40.132 Q4.2@13.716,40.132
  Top Layer w0.5: D9.1 7.424,24.339 R7.1 7.424,25.458 8.645,26.679 14.478,26.679 14.478,26.674 15.589,25.563 C8.1
  Top Layer w1: D14.2 5.715,30.353 v3(5.969,30.099) ; U2.6@15.24,18.923 U2.6 15.24,21.26 C7.2 16.205,24.784 C8.1 v3(17.653,25.4)
  Top Layer w3: D14.2 3.153,31.722 11.557,40.126 Q4.2@11.563,40.132 ; Q4.2 11.684,40.132 18.415,46.863 18.415,53.906 20.872,56.363 ; Q2.3@20.872,57.404 D12.1 20.872,60.877 pad.4 ; Q2.3@21.209,57.404 Q2.3
  Bottom Layer w1: v3(5.969,30.099) 12.954,30.099 v3(17.653,25.4)
NetC10_2: C10.2 C11.1 D15.K U5.1 | length 21
  Bottom Layer w1: C11.1 -8.337,42.999 D15.K -5.08,48.142 -5.08,51.435 U5.1 C10.2
NetC14_2: C14.2 C15.1 D16.K U6.1 | length 14.3
  Bottom Layer w1: C14.2 6.493,47.768 U6.1 7.747,45.475 D16.K 8.292,42.954 C15.1
NetC19_2: C19.2 U7.8 Y1.2 | length 6.4
  Bottom Layer w0.5: U7.8 -10.535,29.343 C19.2 -9.779,31.691 Y1.2
NetC20_2: C20.2 U7.7 Y1.1 | length 9.8
  Bottom Layer w0.4: C20.2 -11.335,30.004 U7.7
  Bottom Layer w0.5: Y1.1 -13.081,33.274 -11.43,31.623 C20.2 ; U7.7@-11.356,27.843 U7.7
NetC22_1: C22.1 C23.1 D11.2 D12.2 Q1.2 Q2.2 R9.2 U3.2 | length 160.9
  Top Layer w0.2: v4(-21.209,19.685) -22.12,18.774 -22.752,18.774 -23.01,18.516 -23.01,17.402 -21.969,16.361 -20.798,16.361 -20.159,15.722 -20.159,14.95 -19.401,14.192 -18.129,14.192 -17.59,13.653 -17.59,12.328 -14.763,9.501 -3.571,9.501 -3.427,9.357 3.845,9.357 4.072,9.584 14.401,9.584 14.841,10.024
  Top Layer w0.3: Q2.2 14.478,57.779 v2(14.478,61.468) ; 14.841,10.024 17.819,13.002 21.348,13.002 21.458,12.892 24.008,12.892 24.928,13.812 24.928,20.111 25.01,20.193 25.01,58.175 24.257,58.928 v2(24.257,59.563)
  Top Layer w3: D11.2 -2.032,58.928 2.032,54.864 D12.2
  Top Layer w10: Q1.2 2.032,54.864 Q2.2
  Bottom Layer w0.3: v2(14.478,61.468) 17.452,61.468 20.131,58.789 21.613,58.789 22.387,59.563 v2(24.257,59.563)
  Bottom Layer w0.4: U3.2 -21.966,18.552 -21.966,19.278 -21.559,19.685 v4(-21.209,19.685)
NetD1_1: D1.A D4.2 Q1.1 R1.2 R3.2 | length 55.6
  Top Layer w0.4: -24.666,18.542 -23.694,19.514 -22.888,19.514 -22.601,19.801 -22.601,20.211 R1.2
  Top Layer w0.5: R1.2 -22.201,20.574 -22.352,20.725 -22.352,22.225 -21.463,23.114 D4.2 -19.661,23.794 R3.2
  Top Layer w0.7: D1.A -23.622,15.621 -24.666,16.665 -24.666,18.542 -24.666,22.179 -24.749,22.262 -24.749,54.626 Q1.1
NetD1_2: D1.K R1.1 U1.7 | length 12.4
  Top Layer w0.5: D1.K -18.47,16.698 -18.288,16.88
  Top Layer w1: R1.1 -20.638,20.524 -20.196,20.524 -19.52,19.848 -19.52,18.892 -19.724,18.688 -19.724,17.38 -19.224,16.88 -18.288,16.88 -16.066,16.88 -15.24,17.706 U1.7 U1.7@-15.24,19.685
NetD2_1: D2.A D5.2 Q3.1 R2.2 R4.2 | length 33
  Top Layer w0.5: R4.2 -8.681,22.802 D5.2 -7.771,26.162 R2.2 -6.477,26.149 D2.A
  Top Layer w1: Q3.1 -17.526,38.285 -17.526,34.29 -15.799,32.563 -15.799,30.98 -15.248,30.429 -13.665,30.429 -9.906,26.67 D5.2
NetD2_2: D2.K R2.1 U1.4 | length 22.1
  Top Layer w0.5: D2.K -4.995,20.502 -4.94,20.447
  Top Layer w0.8: R2.1 -4.94,20.447 -4.94,14.449 -5.581,13.808 U1.4@-12.679,13.808 ; U1.4@-12.679,13.808 U1.4@-12.679,13.958 ; U1.4@-12.679,13.808 -12.679,13.937 U1.4@-12.679,13.808 ; U1.4@-12.679,13.808 U1.4@-12.679,13.958 ; U1.4@-12.679,13.808 U1.4@-12.679,13.958 ; U1.4@-12.679,13.808 U1.4@-12.679,13.958
NetD6_1: D6.A D9.2 Q2.1 R5.1 R7.2 | length 54
  Top Layer w0.5: R5.1 6.972,20.587 9.499,23.114 D9.2 9.549,23.794 R7.2
  Top Layer w0.8: R5.1 6.972,19.732 5.715,18.475 5.715,16.946 6.604,16.057 ; D6.A@7.215,15.621 D6.A ; 6.604,16.057 D6.A ; 6.604,16.057 6.604,15.748 6.731,15.621 D6.A
  Top Layer w1: R5.1 6.823,20.574 5.02,22.377 5.02,24.474 8.229,27.683 10.411,27.683 17.018,34.29 17.018,41.91 21.913,46.805 Q2.1
NetD6_2: D6.K R5.2 U2.7 | length 23.6
  Top Layer w0.2: D6.K@10.857,15.504 D6.K@10.857,15.621
  Top Layer w0.5: D6.K@10.857,15.504 U2.7@13.97,18.616 ; D6.K@10.857,15.504 U2.7@13.97,18.616 ; D6.K@10.857,15.504 U2.7@13.97,18.616 ; D6.K@10.857,15.504 U2.7@13.97,18.616
  Top Layer w0.8: R5.2 8.522,19.907 9.586,18.843 9.586,16.775 D6.K
NetD7_1: D7.A D10.2 Q4.1 R6.1 R8.2 | length 21.4
  Top Layer w0.5: D10.2 20.529,22.802 R8.2 ; R6.1@22.72,26.162 22.733,26.149 D7.A
  Top Layer w0.7: Q4.1 24.27,35.102 24.27,28.65 22.593,26.973 R6.1
  Top Layer w1: D10.2 21.439,26.162 R6.1 R6.1@22.72,26.162
NetD7_2: D7.K R6.2 U2.4 | length 21.1
  Top Layer w0.4: U2.4 16.833,13.614 17.351,14.132 21.816,14.132 21.926,14.022 23.54,14.022 23.798,14.28 23.798,18.994 23.54,19.252 22.859,19.252 22.733,19.378 D7.K 22.733,22.738 23.573,23.578 23.573,25.592 R6.2
NetDS1_2: DS1.2 R14.1 | length 1.4
  Bottom Layer w0.5: R14.1 6.733,12.915 DS1.2
NetDS2_1: DS2.1 U1.1 U7.10 | length 32.4
  Top Layer w0.2: v2(-5.08,12.827) -3.833,14.074 -3.833,18.773 v2(-3.81,18.796)
  Top Layer w0.3: U1.1 -16.51,12.564 -14.868,10.922 -13.194,10.922 -12.703,10.431 -6.842,10.431 -6.351,10.922 v2(-5.08,10.922)
  Bottom Layer w0.2: DS2.1 -7.329,24.949 -6.652,24.272 -6.652,22.654 -3.81,19.812 v2(-3.81,18.796) ; v2(-5.08,10.922) v2(-5.08,12.827)
  Bottom Layer w0.5: U7.10 -9.114,25.601 -7.329,25.601 DS2.1
NetDS2_2: DS2.2 R15.1 | length 1.6
  Bottom Layer w0.5: DS2.2 -4.445,25.527 R15.1
NetDS3_1: DS3.1 U2.1 U7.9 | length 31.3
  Top Layer w0.25: v2(11.43,13.335) 12.098,13.335 U2.1
  Bottom Layer w0.25: DS3.1 -7.256,26.67 -6.544,25.958 -6.544,24.976 -5.928,24.36 -3.744,24.36 -3.464,24.08 -3.464,22.805 -2.54,21.881 -2.54,18.669 -1.555,17.684 2.644,17.684 4.611,15.717 4.611,15.074 5.715,13.97 10.795,13.97 v2(11.43,13.335)
  Bottom Layer w0.5: U7.9 -9.135,26.431 -7.568,26.431 DS3.1
NetDS3_2: DS3.2 R16.1 | length 1.3
  Bottom Layer w0.5: R16.1 -5.92,26.711 DS3.2
NetDS4_1: DS4.1 U7.11 | length 2.7
  Bottom Layer w0.5: U7.11 -8.037,24.822 -7.292,24.077 DS4.1
NetDS4_2: DS4.2 R17.1 | length 1.6
  Bottom Layer w0.5: DS4.2 -5.08,23.495 R17.1
NetR12_2: R12.2 U3.6 U7.27 | length 15
  Bottom Layer w0.2: R12.2 -20.232,12.954 -20.183,13.003 -19.033,13.003 -18.768,13.268 -18.768,14.446 -19.34,15.018 -19.34,20.32 -19.316,20.344 -19.316,21.451 -18.345,22.422 U7.27
  Bottom Layer w0.4: U3.6 -21.306,14.282 R12.2@-21.121,14.097
NetR13_2: R13.2 U3.5 U7.28 | length 11.8
  Bottom Layer w0.4: R13.2 -20.656,14.941 U3.5 -20.656,16.89 -19.939,17.607 -19.939,20.55 -19.856,20.633 -19.856,22.098 -18.891,23.063 -18.865,23.063 -18.706,23.222 U7.28
NetU1_2: U1.2 U2.2 | length 34.5
  Top Layer w0.3: U1.2 -15.24,12.801 -13.901,11.462 -12.971,11.462 -12.48,10.971 -7.066,10.971 -6.226,11.811 -4.566,11.811 -3.042,10.287 3.46,10.287 3.882,10.709 3.882,12.01 4.617,12.745 12.984,12.745 13.97,13.731 U2.2
PROG_1: CON2.2 U7.15 | length 22.3
  Bottom Layer w0.5: U7.15 -7.779,21.622 -3.226,17.069 2.389,17.069 3.996,15.462 3.996,14.256 3.143,13.402 1.143,13.402 0,12.259 CON2.2
PROG_2: CON1.3 U7.16 | length 14.1
  Bottom Layer w0.5: U7.16 -4.628,16.315 0.603,16.315 1.234,15.684 1.714,15.684 CON1.3
PROG_3: CON1.2 U7.17 | length 13.6
  Bottom Layer w0.5: U7.17 -9.581,19.422 -3.562,13.402 -1.456,13.402 CON1.2
PROG_4: CON1.1 R18.2 U7.29 | length 38.1
  Top Layer w0.4: v2(-19.431,25.146) v2(-19.431,27.432) ; v2(-19.177,29.972) v2(-16.383,29.972) ; v2(-14.859,31.369) -12.573,31.369 -8.231,27.027 -4.333,27.027 -4.075,26.769 -4.075,19.966 -3.17,19.061 -3.17,15.489 CON1.1
  Bottom Layer w0.4: R18.2 v2(-19.431,25.146) ; v2(-19.431,27.432) -19.431,29.718 v2(-19.177,29.972) ; v2(-16.383,29.972) -16.256,29.972 v2(-14.859,31.369)
  Bottom Layer w0.5: R18.2 -17.554,24.003 U7.29
REC_1: REC.1 U7.23 | length 11.5
  Bottom Layer w0.5: U7.23 -15.314,19.422 -15.314,18.549 -11.038,14.273 -10.027,14.273 -8.354,12.601 ; -8.279,12.676 REC.1
REC_2: REC.2 U7.24 | length 11
  Bottom Layer w0.5: U7.24 -16.114,19.401 -16.114,18.283 -11.35,13.519 -10.622,13.519 REC.2
REC_3: REC.3 U7.25 | length 12.1
  Bottom Layer w0.2: REC.3@-10.82,11.811 -10.82,12.061
  Bottom Layer w0.5: U7.25 -17.535,19.374 -17.188,19.027 -17.188,18.373 -16.857,18.042 -16.857,17.96 -11.662,12.765 -11.519,12.765 -10.96,12.206 -10.96,12.061 REC.3@-10.672,12.061
REC_4: REC.4 U7.26 | length 13.7
  Bottom Layer w0.3: -18.8,19.663 -18.8,21.118 -18.381,21.537 U7.26@-17.535,21.537
  Bottom Layer w0.4: -18.8,19.663 -17.878,18.741 -17.878,18.005 -11.914,12.041 REC.4 ; U7.26@-17.535,21.537 U7.26
  Bottom Layer w0.5: U7.26@-17.556,21.601 U7.26
pads on no net: C1.2 C22.0 C23.0 D1.0 D2.0 D3.0 D6.0 D7.0 D8.0 D8.A D15.0 D16.0 R12.0 R13.0 R14.0 R15.0 R16.0 R17.0 R18.0 U1.0 U2.0 U5.0 U5.4 U6.0 U6.4 U7.2 U7.12 U7.13 U7.14 U7.19 U7.20 U7.22 U7.30 U7.31 Y1.0

## Polygon pours and split planes (outlines as drawn)
GND on Bottom Layer "BottomPour" (solid, pour order 4): 25.527,8.89 -25.527,8.89 -25.527,65.405 25.527,65.405
GND on Top Layer "TopPour" (solid, pour order 2): -25.527,65.405 25.527,65.405 25.527,8.89 -25.527,8.89

## Keep-outs
Keep-Out Layer:
  lines w0.254: -95.201,0.127 -95.201,67.127 ; -25.527,8.89 -25.527,65.405 25.527,65.405 25.527,8.89 -25.527,8.89

## Text inside footprints (layer, text, board x,y; h text height)
CON1: Bottom Overlay "1" at -2.667,17.907 h1.02 r180; Bottom Overlay "3" at 2.286,17.907 h1.02 r180
CON2: Bottom Overlay "1" at 2.667,8.636 h1.02; Bottom Overlay "3" at -2.286,8.636 h1.02